# Altium PCB board.PcbDoc
Units mm, origin at the board's own origin, x right, y up, seen from the top; angles counter-clockwise.
Board outline 29 x 25 mm, 2 copper layers (Top Layer, Bottom Layer), stack 0.97 mm thick; 7 components, 7 nets, 27 pads, 4 vias.
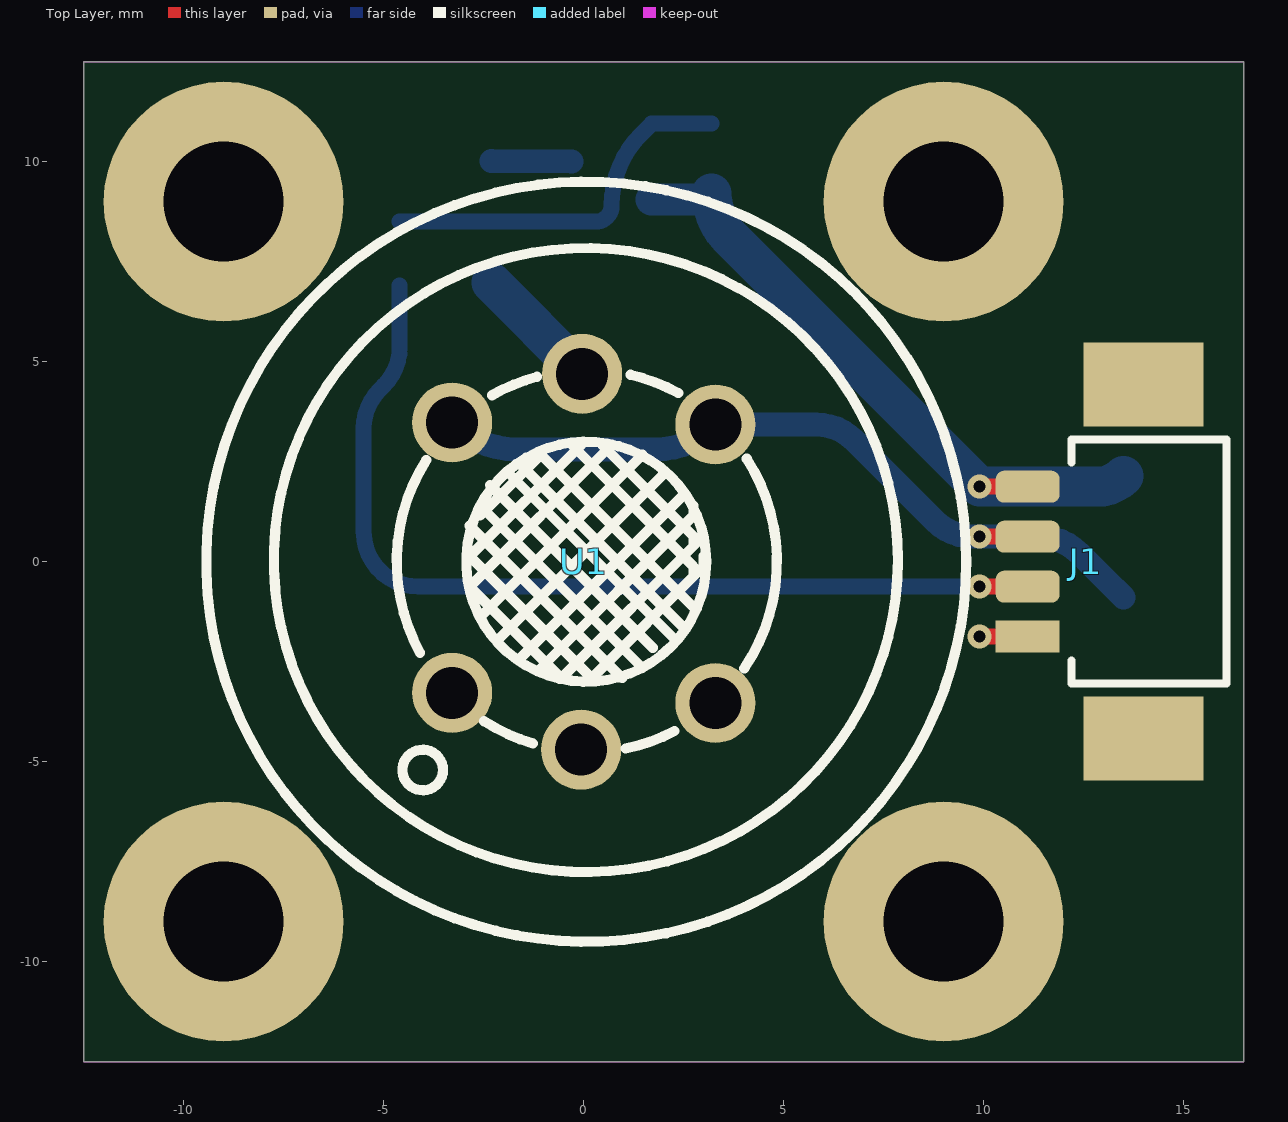
[diagram p0: Top Layer view]
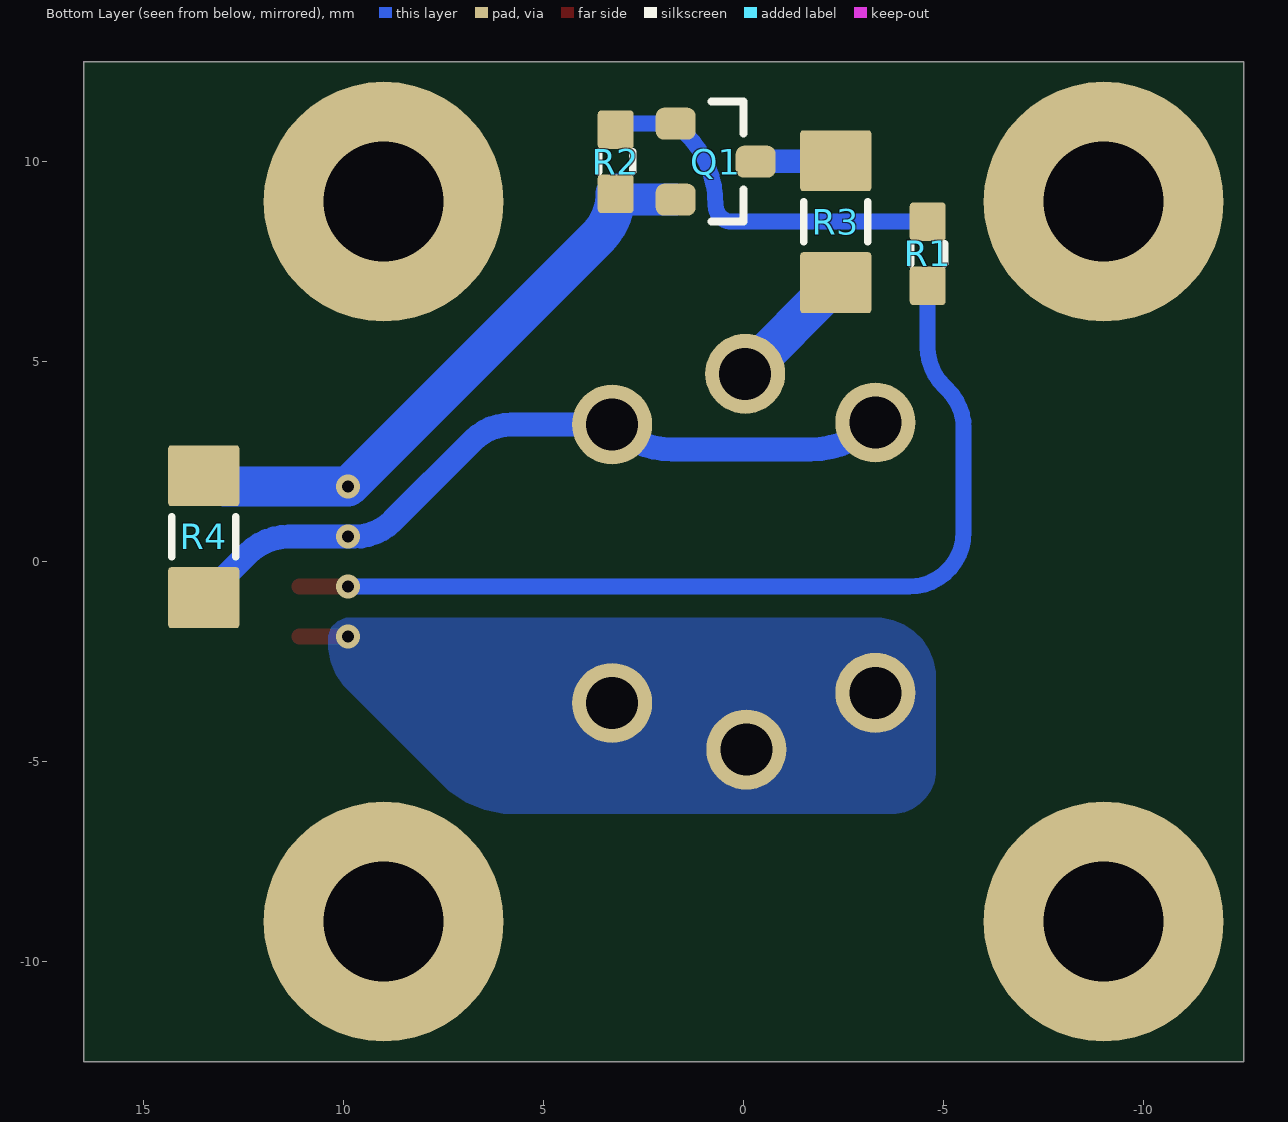
[diagram p1: Bottom Layer view, seen from below]
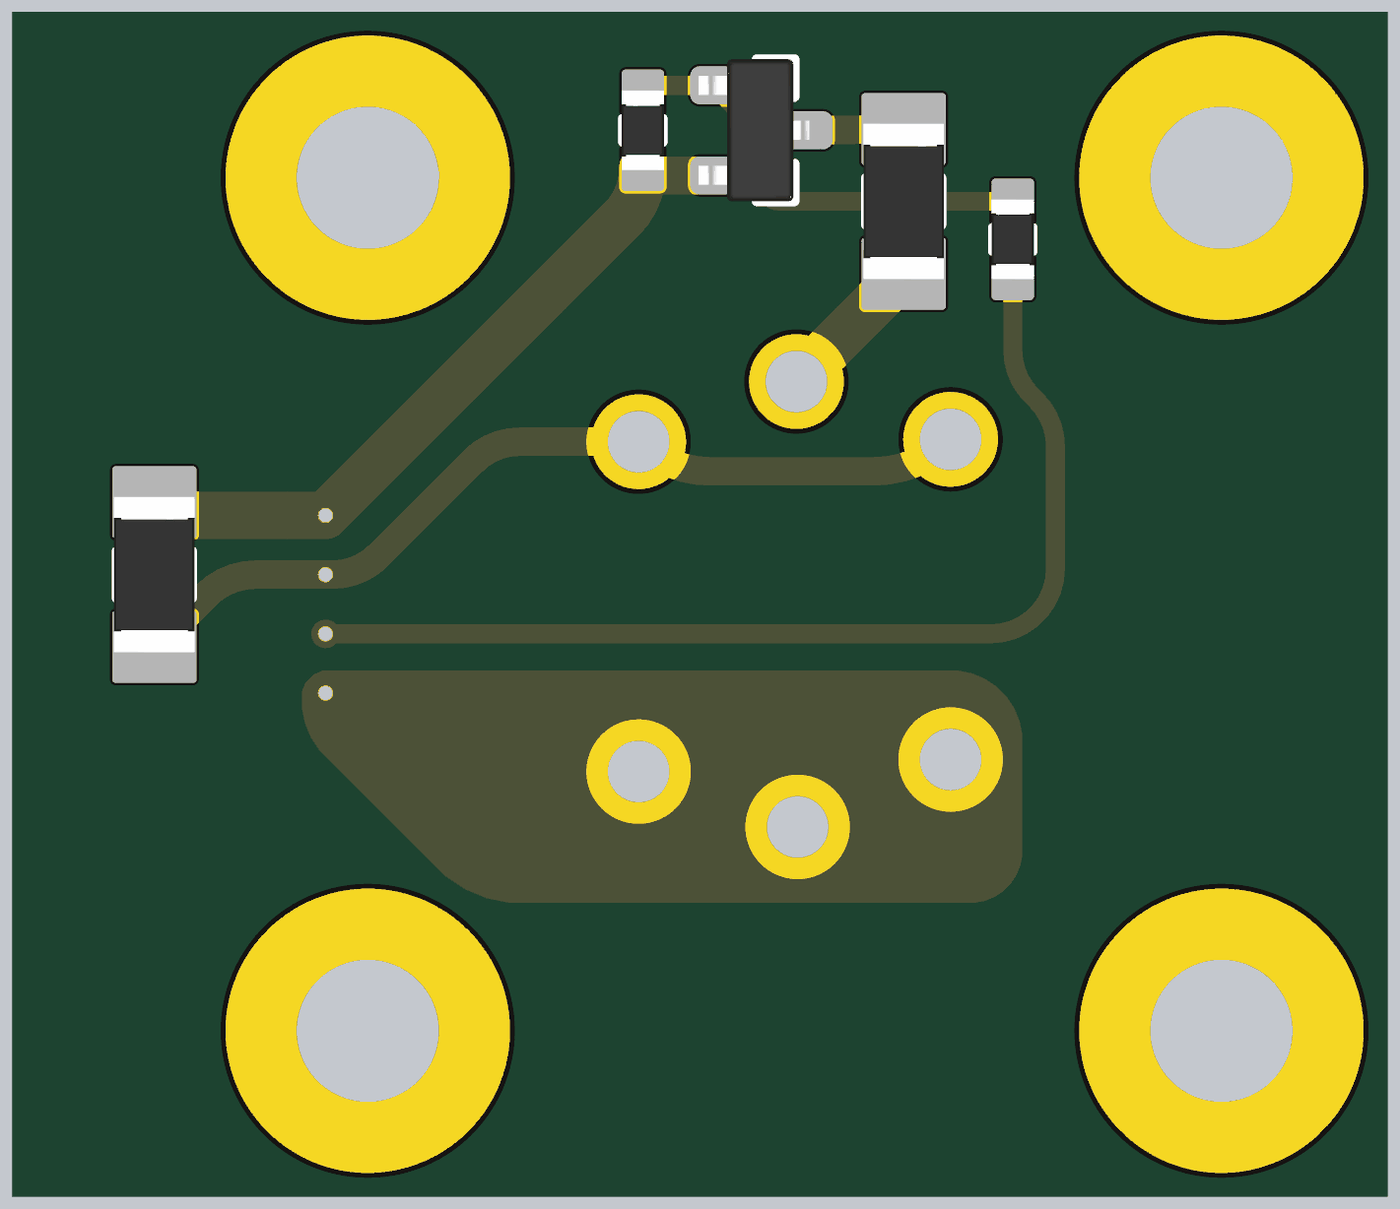
[diagram p2: 3D render of the assembled board from below, using the file's embedded part models]

## Layer stack, top to bottom
Top Solder: solder mask 0.0127, Solder Resist, Dk 3.8
Top Layer: signal copper 0.035
Dielectric: core 0.9, FR-4, Dk 4.5
Bottom Layer: signal copper 0.035
Bottom Solder: solder mask 0.0127, Solder Resist, Dk 3.8

## Board outline
-12.5,-12.5 16.5,-12.5 16.5,12.5 -12.5,12.5

## Design rules (kind name [scope] priority, off if disabled: settings)
AcuteAngle [All] p1: minimum=6.00000000000000E+0001 checktracksonly=FALSE
Clearance Clearance_1 [InNetClass('220') vs InNetClass('220')] p1: gap=1.2 ignorepadtopadclearanceinfootprint=FALSE
Clearance [All] p2: gap=0.25 ignorepadtopadclearanceinfootprint=FALSE except(0.13: Arc-Arc Arc-Track Arc-SMDPad Arc-Via Track-Track Track-SMDPad Track-Via SMDPad-SMDPad SMDPad-Via THPad-Via Via-Via; 0.15: Arc-THPad Arc-Text Arc-Hole Track-THPad Track-Text Track-Hole SMDPad-THPad SMDPad-Text SMDPad-Hole THPad-THPad THPad-Text THPad-Hole Via-Text Via-Hole Fill-Text Fill-Hole Poly-Text Poly-Hole Region-Text Region-Hole Text-Text Text-Hole)
ComponentClearance ComponentClearance_1 [HasFootprint('CONN_DG308-2.54-2P') vs HasFootprint('CONN_DG308-2.54-2P')] p1: gap=-1 collisioncheckmode=3 verticalgap=2540 showdistances=FALSE
ComponentClearance ComponentClearance_2 [HasFootprint('TP_TH_MICRO')] p2: gap=-1 collisioncheckmode=3 verticalgap=2540 showdistances=FALSE
ComponentClearance [All] p3: gap=0.3 collisioncheckmode=3 verticalgap=0.254 showdistances=FALSE
HoleSize [All] p1: absolutevalues=TRUE maxlimit=6 minlimit=0.2 maxpercent=80.000 minpercent=20.000
HoleToHoleClearance HoleToHoleClearance_1 [IsVia vs IsThruPin] p1: gap=0.7 allowstackedmicrovias=TRUE
HoleToHoleClearance [All] p2: gap=0.5 allowstackedmicrovias=TRUE
MinimumSolderMaskSliver [All] p1 off: minsoldermaskwidth=0.254
PlaneClearance [All] p1: clearance=0.45
PlaneConnect [All] p1: planeconnectstyle=Direct reliefexpansion=0.3 reliefentries=4 reliefconductorwidth=0.381 reliefairgap=0.178
PolygonConnect [All] p1: connectstyle=Direct reliefconductorwidth=0.381 reliefentries=4 polygonreliefangle="90 Angle" airgapwidth=0.356
RoutingVias [All] p1: holewidth=0.3 width=0.6 viastyle="Through Hole" minholewidth=0.2 minwidth=0.45 maxholewidth=0.9 maxwidth=1.27
SilkToSilkClearance [All] p1 off: silktosilkclearance=0.254
SilkToSolderMaskClearance [IsPad] p1 off: minsilkscreentomaskgap=0.254 clearancetoexposedcopper=TRUE
SolderMaskExpansion [All] p1: expansion=0.102 istentingtop=FALSE
UnRoutedNet [All] p1: checkbadconnections=TRUE
Width [All] p1: maxlimit=3.81 minlimit=0.14 preferedwidth=0.254
21 further rules are at their usual default settings.

## Components (designator, comment, footprint, x,y, rotation, side; value= is the part's Value field where it differs from the comment)
J1 "532610471" CONN_MOLEX_532610471 14,0 r90 top
Q1 "BSS123" SOT-23 0.7,10 r0 bottom
R1 "470" R0603 -4.6,7.7 r270 bottom
R2 "100k" R0603 3.2,10 r270 bottom
R3 "5R1" R1206 -2.3,8.5 r90 bottom
R4 "47k" R1206 13.5,0.625 r90 bottom
U1 "MQ-2" SENSOR-TH_MQ-2 0,0 r90 top

## Footprints (in the part's own frame and the unit in brackets; to place one, negate y for a bottom-side part, rotate by r counter-clockwise, add the part's x,y. Pads: shape width x height; smd on the part's side, far side on the other; paste and mask are expansions set on the pad)
CONN_MOLEX_532610471 [mm] "R/A"
  rect 0.8x1.6 smd: 1(-1.875,2.9)
  rrect50% 0.8x1.6 smd: 2(-0.625,2.9) 3(0.625,2.9) 4(1.875,2.9)
  rect 2.1x3 smd: 5(-4.425,0) 5(4.425,0)
  silkscreen extent -3.05,-2.08 3.05,1.8, body extent -5.08,-2.08 5.07,3.13, height 3.4
R0603 [mil] "Chip Resistor; Body 1.6 x 0.8 mm (LxW typ)"
  rrect20% 38x35.43 smd mask+1.97: 1(-31.5,0) 2(31.5,0)
  silkscreen extent -10,-17 10,17, body extent -33,-18 33,18, height 22
R1206 [mil] "Chip Resistor"
  rrect10% 60x70 smd mask+1.97: 1(-60,0) 2(60,0)
  silkscreen extent -20,-31 20,31, body extent -65,-33 65,33, height 26
SENSOR-TH_MQ-2 [mm]
  round 2 hole 1.3: 1(-3.277,3.289) 2(-4.699,0.063) 3(-3.531,-3.289) 4(3.429,-3.289) 5(4.699,0.038) 6(3.48,3.289)
  silkscreen extent -9.5,-9.56 9.5,9.43
SOT-23 [mm]
  rrect50% 1x0.8 smd mask+0.05: 1(1,-0.95) 2(1,0.95) 3(-1,0)
  silkscreen extent -0.7,-1.5 0.1,1.5, body extent -1.27,-1.5 1.33,1.5, height 1.1

## Part data
J1: library part "Header 3"
Q1: library part 2N7002
R1: library part RES, "470 0603"
R2: library part RES, "100k 0603"
R3: library part RES, "5R1 1206"
R4: library part RES, "47k 1206"

## Free pads (board coordinates)
  round 6 hole 3: M(-9,-9) M(-9,9) M(9,-9) M(9,9)

## Via types
v1: diameter 0.6, hole 0.3, Top Layer to Bottom Layer, tented both sides, 4 vias

## Nets (pads, with @x,y where several pads share a name; then routed paths per layer and width w, separated by ;. In a path a pad name is that pad's centre, name@x,y a point inside that pad or via, vN(x,y) a via of type N, cw(c..) or ccw(c..) an arc to the next point about the centre after c; other vN are vias at no path point)
GND: J1.4 Q1.2 R2.2 R4.2 | length 16.5
  Top Layer w0.4: v1(9.89,1.875) J1.4
  Bottom Layer w0.8: Q1.2 2.838,9.05 ccw(c2.838,9.562) R2.2
  Bottom Layer w1: R2.2 ccw(c4.732,9.2) 3.649,8.116 v1(9.89,1.875) 12.839,1.875 ccw(c12.839,2.81) R4.2
NetJ1_1: J1.1 U1.1 U1.2 U1.3 | length 1.2
  Top Layer w0.4: v1(9.89,-1.875) J1.1
NetJ1_2: J1.2 R1.2 | length 23.8
  Top Layer w0.4: v1(9.89,-0.625) J1.2
  Bottom Layer w0.4: R1.2 -4.6,5.366 cw(c-5.966,5.366) -5,4.4 -5.098,4.302 ccw(c-4.128,3.332) -5.5,3.332 -5.5,0.747 ccw(c-4.128,0.747) -4.128,-0.625 v1(9.89,-0.625)
NetJ1_3: J1.3 R4.1 U1.4 U1.6 | length 20
  Top Layer w0.4: v1(9.89,0.625) J1.3
  Bottom Layer w0.6: U1.6 ccw(c-1.658,5.111) -1.658,2.804 1.781,2.804 ccw(c1.781,4.938) U1.4 5.803,3.429 cw(c5.803,2.057) 6.773,3.027 8.773,1.027 ccw(c9.743,1.997) 9.743,0.625 v1(9.89,0.625) 11.365,0.625 cw(c11.365,-0.85) 12.408,0.193 13.032,-0.431 R4.1
NetQ1_1: Q1.1 R1.1 R2.1 | length 9.4
  Bottom Layer w0.4: R1.1 0.292,8.5 ccw(c0.292,8.908) 0.7,8.908 cw(c3.215,8.908) 1.437,10.687 Q1.1 R2.1@3.2,10.95
NetQ1_3: Q1.3 R3.2 | length 2
  Bottom Layer w0.6: R3.2 Q1.3
NetR3_1: R3.1 U1.5 | length 3.2
  Bottom Layer w1: R3.1 U1.5
pads on no net: J1.5

## Polygon pours and split planes (outlines as drawn)
NetJ1_1 on Bottom Layer "NONET_L02_P-001" (solid, remove dead copper, pour order 0): -3.3,-1.4 ccw(c-3.3,-2.9) -4.8,-2.9 -4.8,-5.2 ccw(c-3.7,-5.2) -3.7,-6.3 5.758,-6.3 ccw(c5.758,-3.785) 7.537,-5.563 9.9,-3.2 ccw(c8.712,-2.012) 10.392,-2.012 10.392,-1.955 ccw(c9.837,-1.955) 9.837,-1.4

## Keep-outs
Keep-Out Layer:
  the board outline again, w0